# Altium PCB UU111_UUControl_CPUBoard.PcbDoc
Units mm, origin at the board's own origin, x right, y up, seen from the top; angles counter-clockwise.
Board outline 67.6 x 45 mm, 4 copper layers (Top Layer, GND, PWR, Bottom Layer), stack 1.483 mm thick; 65 components, 76 nets, 350 pads, 118 vias.
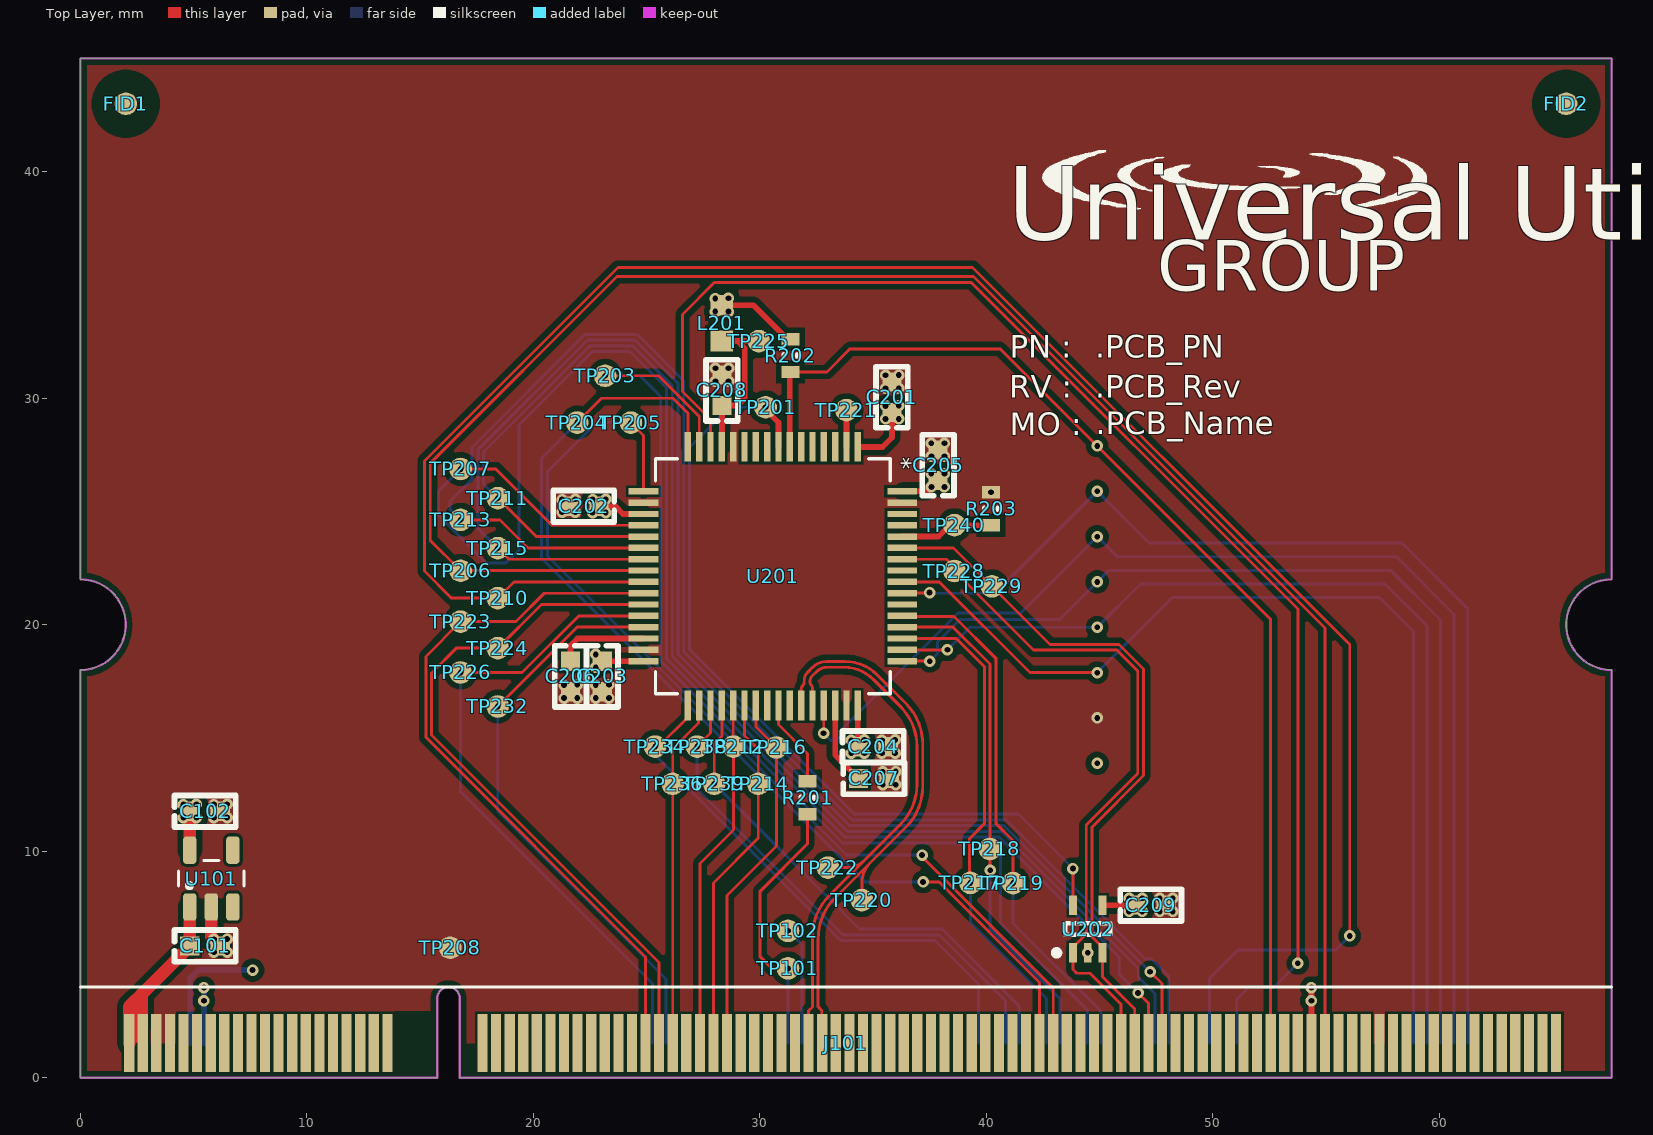
[diagram p0: Top Layer view]
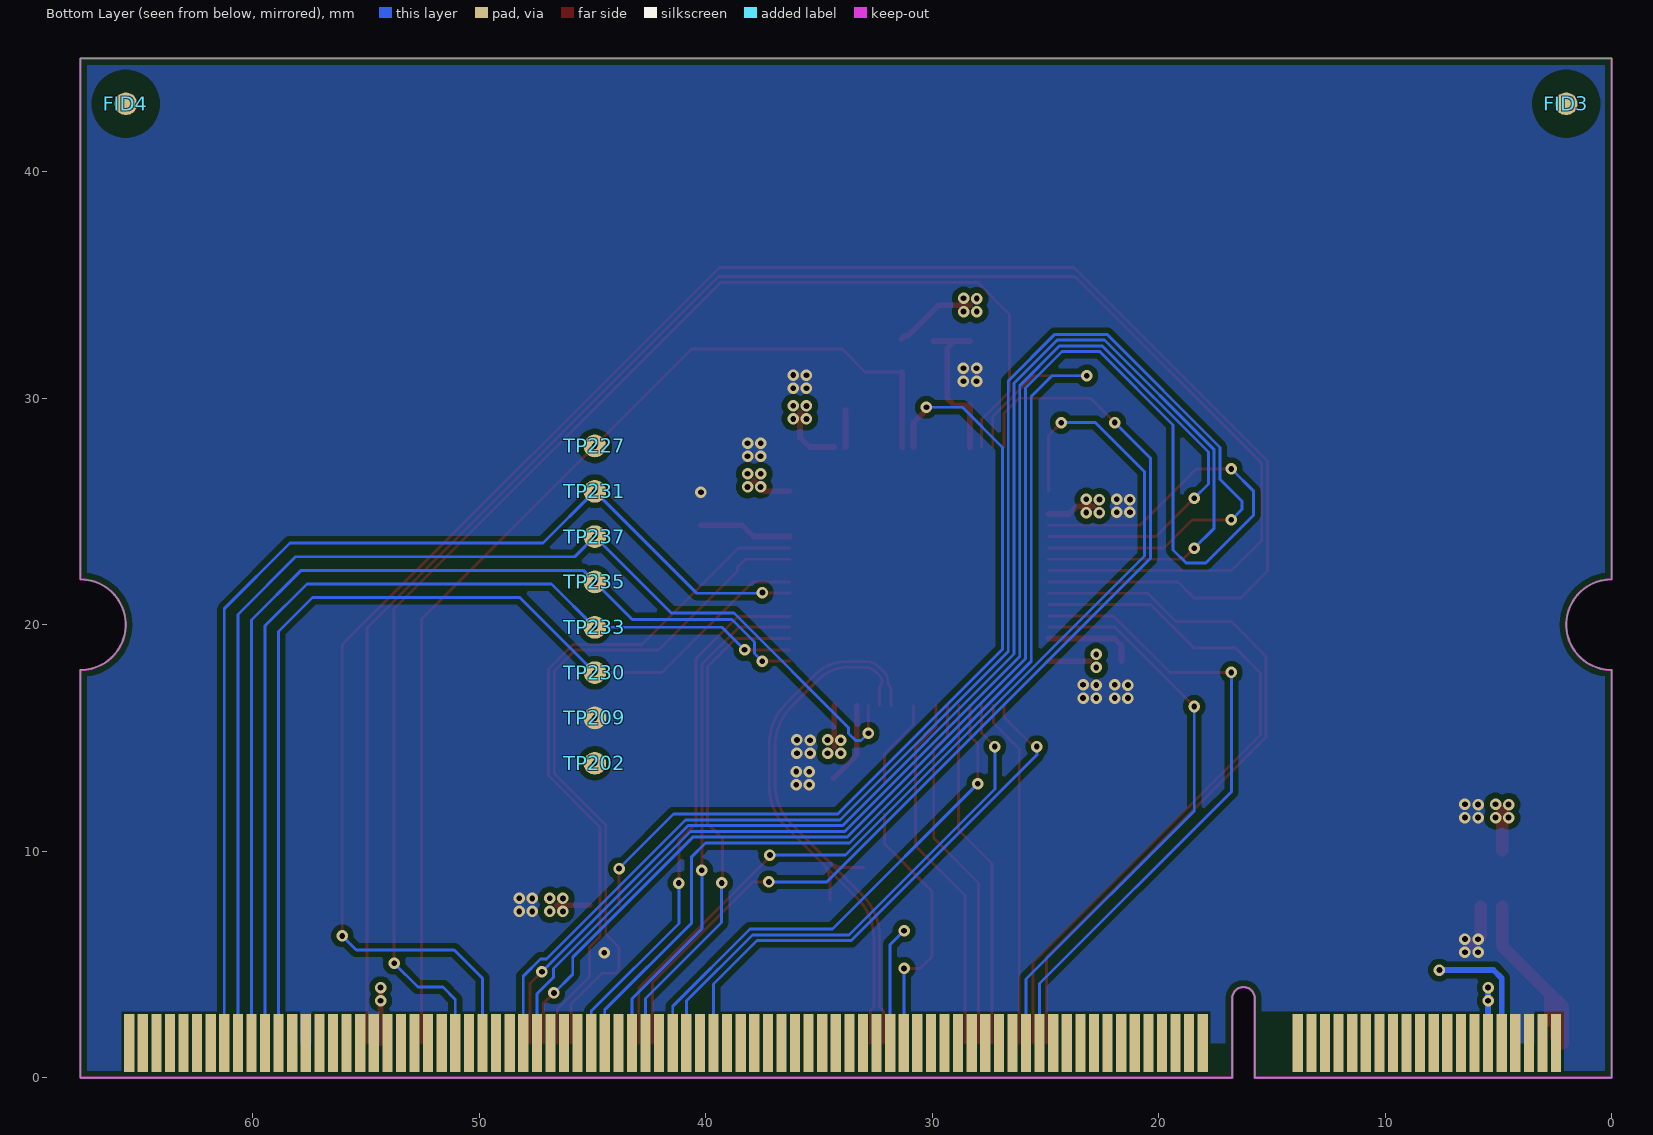
[diagram p1: Bottom Layer view, seen from below]
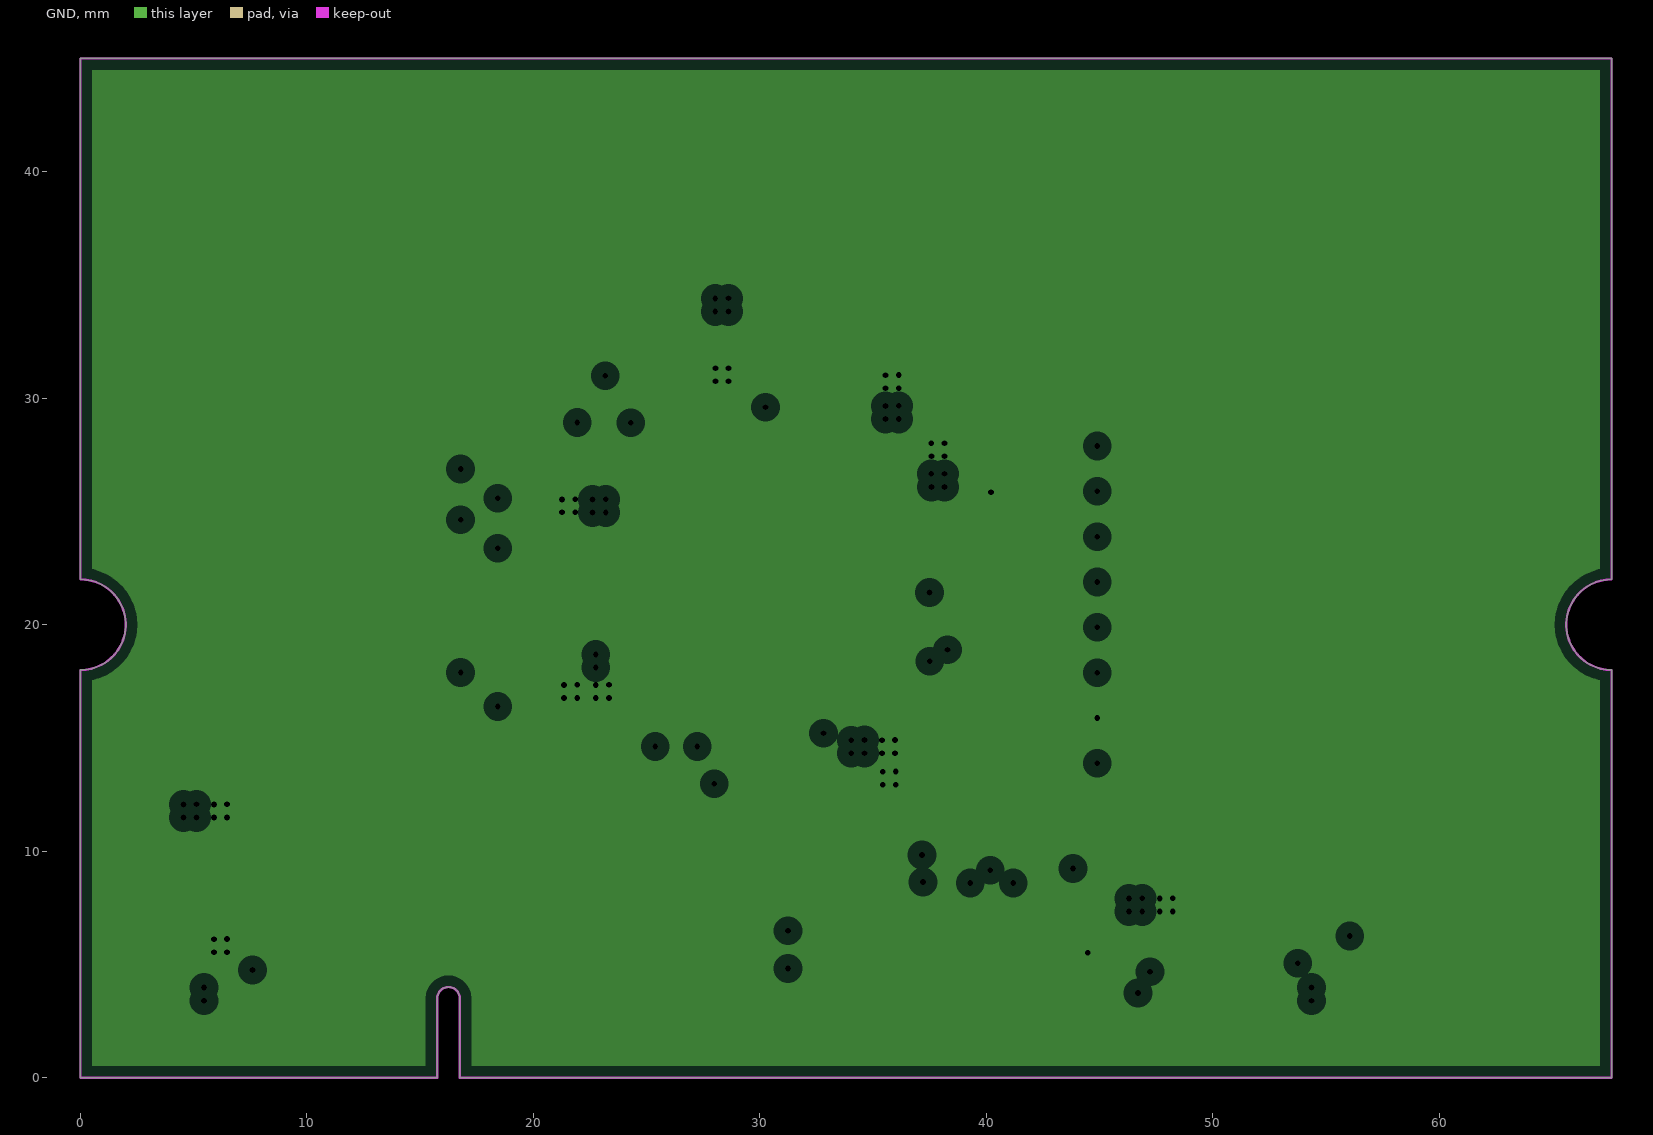
[diagram p2: GND, clearances drawn from the general rule]
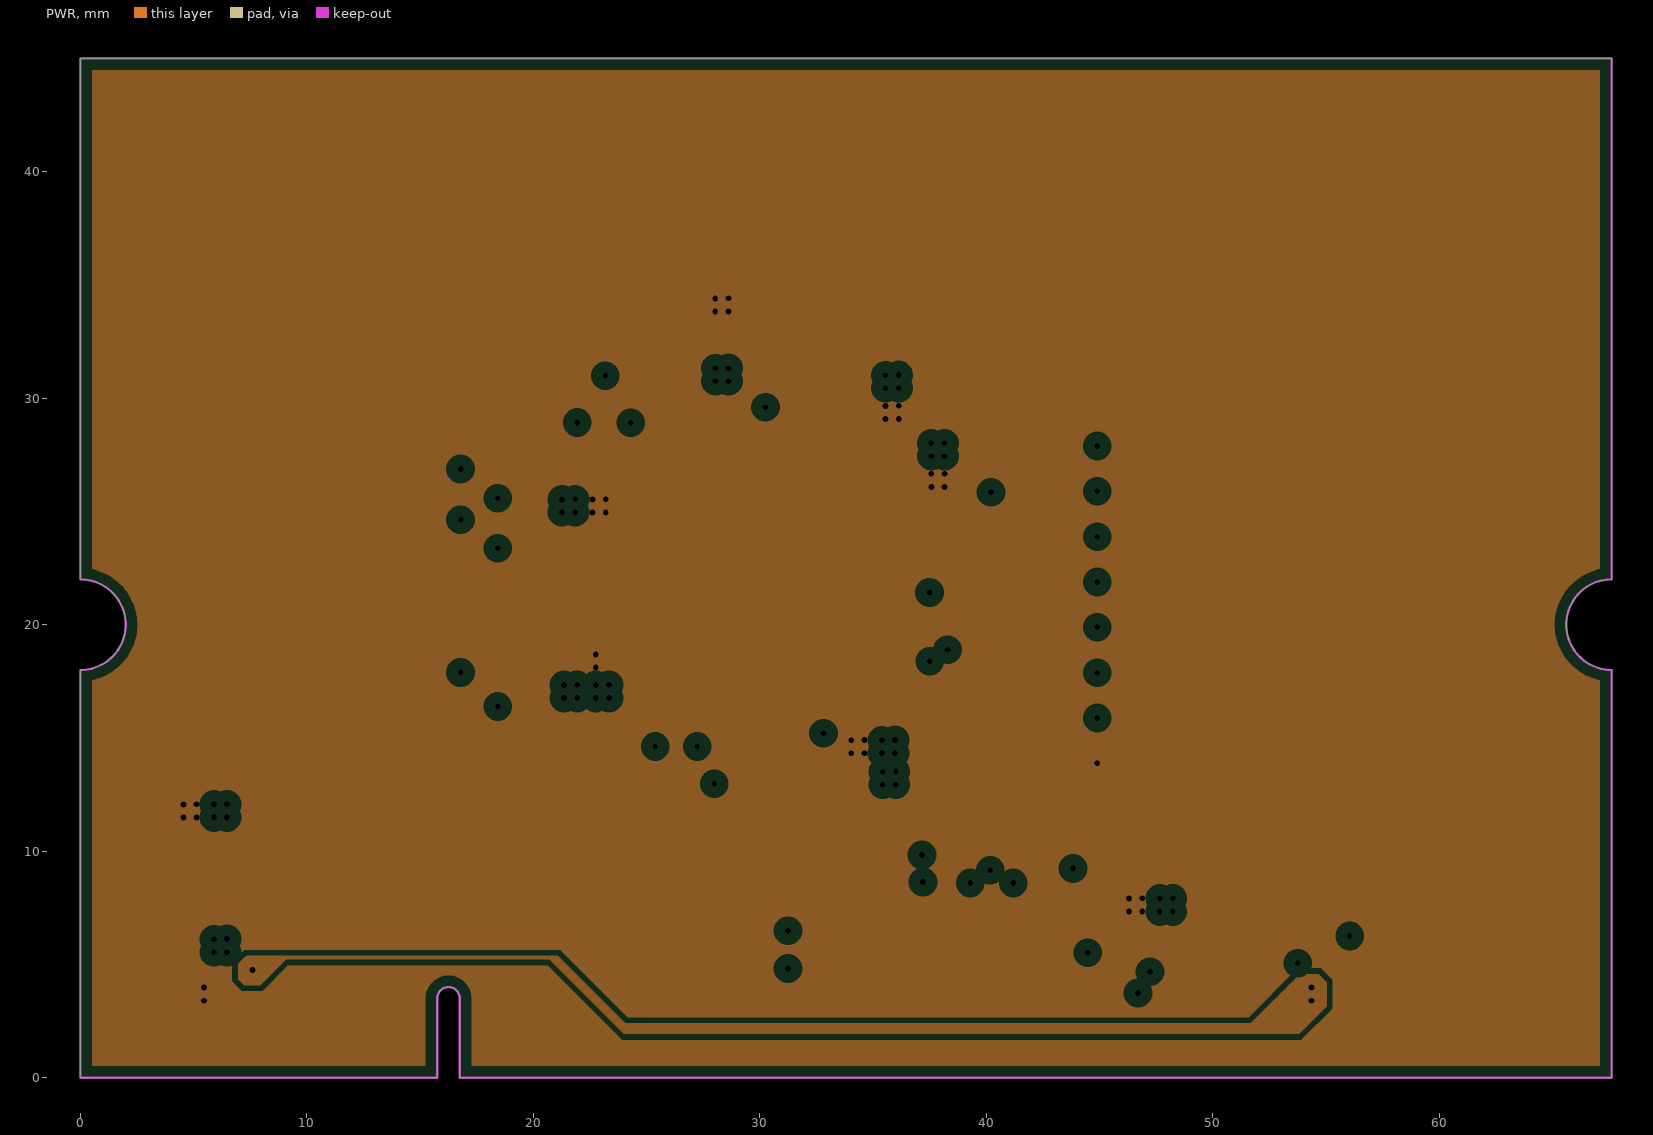
[diagram p3: PWR, clearances drawn from the general rule]
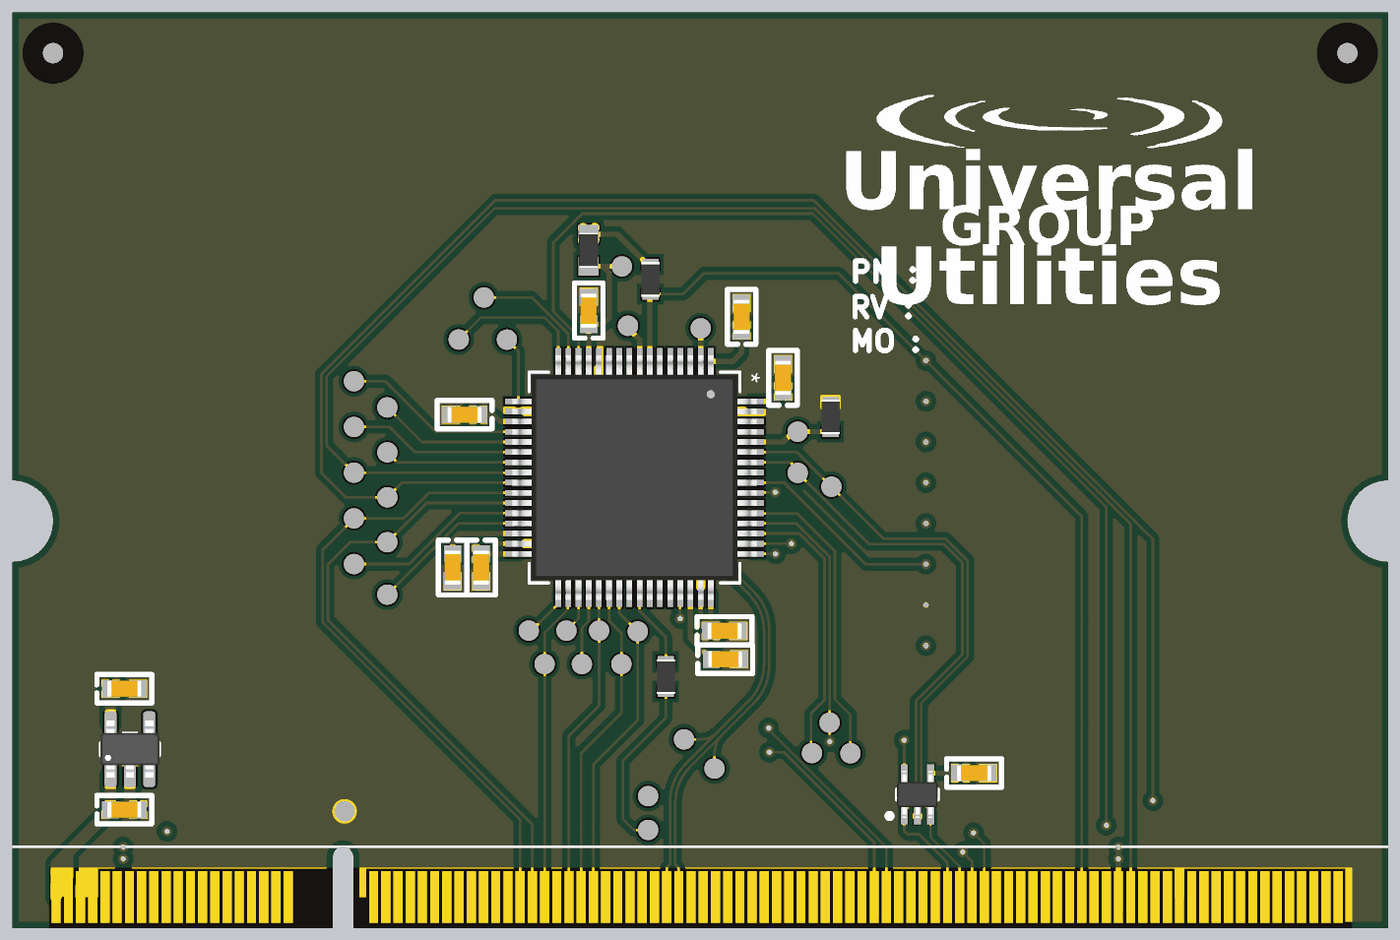
[diagram p4: 3D render of the assembled board from above, using the file's embedded part models]

## Layer stack, top to bottom
Top Solder: solder mask 0.0254, Solder Resist, Dk 3.5
Top Layer: signal copper 0.0356
Dielectric 1: prepreg 0.0711, PP-006, Dk 4.1
GND: plane copper 0.035, net DGND
Core: core 1.2, FR-4, Dk 3.95
PWR: plane copper 0.035, net +3.3VD
Dielectric 2: prepreg 0.0711, PP-006, Dk 4.1
Bottom Layer: signal copper 0.0356
Bottom Solder: solder mask 0.0254, Solder Resist, Dk 3.5

## Board outline
0,0 0,18 ccw(c0,20) 0,22 0,45 67.6,45 67.6,22 ccw(c67.6,20) 67.6,18 67.6,0 16.75,0 16.75,3.5 ccw(c16.25,3.5) 16.25,4 ccw(c16.25,3.5) 15.75,3.5 15.75,0

## Design rules (kind name [scope] priority, off if disabled: settings)
Clearance Clearance_FID [HasPad('FID*')] p1: gap=1 ignorepadtopadclearanceinfootprint=FALSE except(0: Arc-Hole Track-Hole SMDPad-Hole THPad-Hole Via-Hole Fill-Hole Poly-Hole Region-Hole Text-Hole)
Clearance Clearance_USB [HasPad('J40*')] p2: gap=0.127 ignorepadtopadclearanceinfootprint=FALSE
Clearance Clearance_Polygon [InNamedPolygon('MVA') or InNamedPolygon('MVAP')  or InNamedPolygon('3V') or InNamedPolygon('AGNDP')] p3: gap=0.556 ignorepadtopadclearanceinfootprint=FALSE except(0: Arc-Hole Track-Hole SMDPad-Hole THPad-Hole Via-Hole Fill-Hole Poly-Hole Region-Hole Text-Hole)
Clearance Clearance_IC [HasPad('C*') or  HasPad('U*') or HasPad('J*') or HasPad('Q*')] p4: gap=0.127 ignorepadtopadclearanceinfootprint=FALSE except(0: Arc-Hole Track-Hole SMDPad-Hole THPad-Hole Via-Hole Fill-Hole Poly-Hole Region-Hole Text-Hole)
Clearance Clearance_GND [InNet('AGND') or InNet('DGND')  or InNamedPolygon('DGNDP')] p5: gap=0.254 ignorepadtopadclearanceinfootprint=FALSE except(0: Arc-Hole Track-Hole SMDPad-Hole THPad-Hole Via-Hole Fill-Hole Poly-Hole Region-Hole Text-Hole)
Clearance [All] p6: gap=0.127 ignorepadtopadclearanceinfootprint=FALSE except(0: Arc-Hole Track-Hole SMDPad-Hole THPad-Hole Via-Hole Fill-Hole Poly-Hole Region-Hole Text-Hole)
ComponentClearance ComponentClearance_DDR [HasFootprint('DDR2-SO-DIMM')] p1: gap=0 collisioncheckmode=3 verticalgap=0 showdistances=FALSE
ComponentClearance [All] p2: gap=0.254 collisioncheckmode=3 verticalgap=0.254 showdistances=FALSE
DiffPairsRouting DiffPairsRouting_1 [All] p2: maxlimit=0.254 minlimit=0.254 mostfreqgap=0.254 toplayer_minwidth=0.381 toplayer_maxwidth=0.381 toplayer_prefwidth=0.381 bottomlayer_minwidth=0.381 bottomlayer_maxwidth=0.381 bottomlayer_prefwidth=0.381 maxuncoupledlength=12.7
FanoutControl Fanout_LCC [IsLCC] p1: bgadir=Out bgaviamode=Centered fanoutstyle=Auto fanoutdirection=Alternating viagrid=0.025 // Fanout_LCC (Default Rule)
FanoutControl Fanout_SOIC [IsSOIC] p2: bgadir=Out bgaviamode=Centered fanoutstyle=Auto fanoutdirection=Alternating viagrid=0.025 // Fanout_SOIC (Default Rule)
FanoutControl Fanout_BGA [IsBGA] p3: bgadir=Out bgaviamode=Centered fanoutstyle=Auto fanoutdirection=Alternating viagrid=0.025 // Fanout_BGA (Default Rule)
FanoutControl Fanout_Default [All] p4: bgadir=Out bgaviamode=Centered fanoutstyle=Auto fanoutdirection=Alternating viagrid=0.025 // Fanout_Default (Default Rule)
FanoutControl Fanout_Small [(CompPinCount < 5)] p5: bgadir=Out bgaviamode=Centered fanoutstyle=Auto fanoutdirection=OutThenIn viagrid=0.025 // Fanout_Small (Default Rule)
HoleToHoleClearance [All] p1: gap=0.25 allowstackedmicrovias=TRUE
MinimumAnnularRing [All] p1: minimumring=0.05
MinimumSolderMaskSliver [All] p1: minsoldermaskwidth=0.05
PasteMaskExpansion PasteMaskExpansion_1 [All] p2: expansion=0
PlaneClearance [All] p1: clearance=0.508
PlaneConnect [All] p1: planeconnectstyle=Direct reliefexpansion=0.508 reliefentries=4 reliefconductorwidth=0.254 reliefairgap=0.254
PolygonConnect [All] p1: connectstyle=Direct reliefconductorwidth=0.254 reliefentries=4 polygonreliefangle="90 Angle" airgapwidth=0.254
RoutingVias [All] p1: holewidth=0.711 width=1.27 viastyle="Through Hole" minholewidth=0.15 minwidth=0.3 maxholewidth=0.711 maxwidth=1.27
SilkToBoardRegionClearance SilkToBoardRegionClearance_3 [All] p2:
SilkToBoardRegionClearance SilkToBoardRegionClearance_2 [All] p3:
SilkToBoardRegionClearance SilkToBoardRegionClearance_1 [All] p4:
SilkToSolderMaskClearance [IsPad] p1: minsilkscreentomaskgap=0.12 clearancetoexposedcopper=TRUE
SolderMaskExpansion [All] p1: expansion=0.102 istentingtop=FALSE
SolderMaskExpansion SolderMaskExpansion_1 [All] p2: expansion=0.102 istentingtop=FALSE
Width Width_BGA [All] p1: maxlimit=5.56 minlimit=0.127 preferedwidth=0.254
Width [All] p2: maxlimit=5.56 minlimit=0.127 preferedwidth=0.254
19 further rules are at their usual default settings.

## Classes and differential pairs
component class MCU: C201 C202 C203 C204 C205 C206 C207 C208 C209 L201 R201 R202 R203 TP201 TP202 TP203 TP204 TP205 TP206 TP207 TP208 TP209 TP210 TP211 TP212 TP213 TP214 TP215 TP216 TP217 TP218 TP219 TP220 TP221 TP222 TP223 TP224 TP225 TP226 TP227 TP228 TP229 TP230 TP231 TP232 TP233 TP234 TP235 TP236 TP237 TP238 TP239 TP240 U201 U202
component class 0_Overview: FID1 FID2 FID3 FID4 PCB1
component class MainControl: C101 C102 J101 TP101 TP102 U101

## Components (designator, comment, footprint, x,y, rotation, side; value= is the part's Value field where it differs from the comment)
C101 "0.1uF" C_0603 5.502,5.816 r0 top
C102 "0.1uF" C_0603 5.502,11.764 r0 top
C201 "0.1uF" C_0603 35.83,30.04 r90 top
C202 "0.1uF" C_0603 22.22,25.23 r180 top
C203 "0.1uF" C_0603 23.037,17.715 r270 top
C204 "0.1uF" C_0603 34.995,14.607 r0 top
C205 "0.1uF" C_0603 37.866,27.041 r90 top
C206 "0.1uF" C_0603 21.637,17.715 r270 top
C207 "0.1uF" C_0603 35.03,13.21 r0 top
C208 "0.1uF" C_0603 28.32,30.348 r90 top
C209 "0.1uF" C_0603 47.258,7.618 r0 top
FID1 "FIDUCIAL" FID 2,43 r0 top value="Non SE"
FID2 "FIDUCIAL" FID 65.6,43 r90 top value="Non SE"
FID3 "FIDUCIAL" FID 2,43 r90 bottom value="Non SE"
FID4 "FIDUCIAL" FID 65.6,43 r90 bottom value="Non SE"
J101 "1473149-4" DDR2-SO-DIMM 0,0 r0 top locked
L201 "10uH" L_0603 28.314,33.313 r270 top
R201 "0" R_0603 32.105,12.361 r270 top
R202 "150k" R_0603 31.349,31.883 r270 top
R203 "0" R_0603 40.203,25.121 r270 top
TP101 "" TP_Testpoint 31.239,4.824 r180 top
TP102 "" TP_Testpoint 31.239,6.484 r180 top
TP201 "" TP_Testpoint 30.25,29.6 r0 top
TP202 "" TP_Testpoint 44.89,13.88 r180 bottom
TP203 "" TP_Testpoint 23.168,30.99 r270 top
TP204 "" TP_Testpoint 21.933,28.925 r0 top
TP205 "" TP_Testpoint 24.3,28.92 r0 top
TP206 "" TP_Testpoint 16.785,22.382 r180 top
TP207 "" TP_Testpoint 16.785,26.875 r0 top
TP208 "" TP_Testpoint 16.325,5.737 r0 top
TP209 "" TP_Testpoint 44.89,15.882 r0 bottom
TP210 "" TP_Testpoint 18.425,21.171 r180 top
TP211 "" TP_Testpoint 18.425,25.587 r0 top
TP212 "" TP_Testpoint 28.829,14.618 r270 top
TP213 "" TP_Testpoint 16.785,24.628 r0 top
TP214 "" TP_Testpoint 29.926,12.975 r270 top
TP215 "" TP_Testpoint 18.425,23.379 r0 top
TP216 "" TP_Testpoint 30.728,14.578 r90 top
TP217 "" TP_Testpoint 39.29,8.6 r180 top
TP218 "" TP_Testpoint 40.153,10.097 r180 top
TP219 "" TP_Testpoint 41.18,8.59 r270 top
TP220 "" TP_Testpoint 34.5,7.84 r180 top
TP221 "" TP_Testpoint 33.82,29.474 r0 top
TP222 "" TP_Testpoint 33.004,9.272 r180 top
TP223 "" TP_Testpoint 16.785,20.136 r0 top
TP224 "" TP_Testpoint 18.425,18.963 r0 top
TP225 "" TP_Testpoint 29.95,32.52 r0 top
TP226 "" TP_Testpoint 16.785,17.889 r0 top
TP227 "" TP_Testpoint 44.89,27.891 r0 bottom
TP228 "" TP_Testpoint 38.59,22.37 r0 top
TP229 "" TP_Testpoint 40.245,21.692 r0 top
TP230 "" TP_Testpoint 44.89,17.883 r180 bottom
TP231 "" TP_Testpoint 44.89,25.889 r180 bottom
TP232 "" TP_Testpoint 18.425,16.388 r0 top
TP233 "" TP_Testpoint 44.89,19.885 r0 bottom
TP234 "" TP_Testpoint 25.375,14.618 r270 top
TP235 "" TP_Testpoint 44.89,21.886 r180 bottom
TP236 "" TP_Testpoint 26.15,12.975 r270 top
TP237 "" TP_Testpoint 44.89,23.888 r0 bottom
TP238 "" TP_Testpoint 27.227,14.618 r90 top
TP239 "" TP_Testpoint 27.983,12.975 r90 top
TP240 "" TP_Testpoint 38.59,24.396 r0 top
U101 "RT9069-33GB" SOT95P280X145-5N 5.777,8.79 r90 top
U201 "STM32H7A3RGT6" LQFP64 30.57,22.14 r270 top
U202 "24AA02HT-I/LT" SOT65P210X110-5N 44.473,6.562 r90 top

## Footprints (in the part's own frame and the unit in brackets; to place one, negate y for a bottom-side part, rotate by r counter-clockwise, add the part's x,y. Pads: shape width x height; smd on the part's side, far side on the other; paste and mask are expansions set on the pad)
C_0603 [mm] "Chip Capacitor, 2-Leads, Body 1.60x0.75mm, IPC Medium Density"
  rect 0.85x0.85 smd mask+0.03: 1(-0.675,0) 2(0.675,0)
  silkscreen extent -1.35,-0.7 1.35,0.7, body extent -0.85,-0.4 0.85,0.4, height 0.8
DDR2-SO-DIMM [mm]
  rect 0.45x2.55 smd paste-0.9 mask+0.102: 1(2.15,1.525) 3(2.75,1.525) 5(3.35,1.525) 7(3.95,1.525) 9(4.55,1.525) 11(5.15,1.525) 13(5.75,1.525) 15(6.35,1.525) 17(6.95,1.525) 19(7.55,1.525) 21(8.15,1.525) 23(8.75,1.525) 25(9.35,1.525) 27(9.95,1.525) 29(10.55,1.525) 31(11.15,1.525) 33(11.75,1.525) 35(12.35,1.525) 37(12.95,1.525) 39(13.55,1.525) 41(17.75,1.525) 43(18.35,1.525) 45(18.95,1.525) 47(19.55,1.525) 49(20.15,1.525) 51(20.75,1.525) 53(21.35,1.525) 55(21.95,1.525) 57(22.55,1.525) 59(23.15,1.525) 61(23.75,1.525) 63(24.35,1.525) 65(24.95,1.525) 67(25.55,1.525) 69(26.15,1.525) 71(26.75,1.525) 73(27.35,1.525) 75(27.95,1.525) 77(28.55,1.525) 79(29.15,1.525) 81(29.75,1.525) 83(30.35,1.525) 85(30.95,1.525) 87(31.55,1.525) 89(32.15,1.525) 91(32.75,1.525) 93(33.35,1.525) 95(33.95,1.525) 97(34.55,1.525) 99(35.15,1.525) 101(35.75,1.525) 103(36.35,1.525) 105(36.95,1.525) 107(37.55,1.525) 109(38.15,1.525) 111(38.75,1.525) 113(39.35,1.525) 115(39.95,1.525) 117(40.55,1.525) 119(41.15,1.525) 121(41.75,1.525) 123(42.35,1.525) 125(42.95,1.525) 127(43.55,1.525) 129(44.15,1.525) 131(44.75,1.525) 133(45.35,1.525) 135(45.95,1.525) 137(46.55,1.525) 139(47.15,1.525) 141(47.75,1.525) 143(48.35,1.525) 145(48.95,1.525) 147(49.55,1.525) 149(50.15,1.525) 151(50.75,1.525) 153(51.35,1.525) 155(51.95,1.525) 157(52.55,1.525) 159(53.15,1.525) 161(53.75,1.525) 163(54.35,1.525) 165(54.95,1.525) 167(55.55,1.525) 169(56.15,1.525) 171(56.75,1.525) 173(57.35,1.525) 175(57.95,1.525) 177(58.55,1.525) 179(59.15,1.525) 181(59.75,1.525) 183(60.35,1.525) 185(60.95,1.525) 187(61.55,1.525) 189(62.15,1.525) 191(62.75,1.525) 193(63.35,1.525) 195(63.95,1.525) 197(64.55,1.525) 199(65.15,1.525)
  rect 0.45x2.55 smd far side paste-0.9 mask+0.102: 2(2.45,1.525) 4(3.05,1.525) 6(3.65,1.525) 8(4.25,1.525) 10(4.85,1.525) 12(5.45,1.525) 14(6.05,1.525) 16(6.65,1.525) 18(7.25,1.525) 20(7.85,1.525) 22(8.45,1.525) 24(9.05,1.525) 26(9.65,1.525) 28(10.25,1.525) 30(10.85,1.525) 32(11.45,1.525) 34(12.05,1.525) 36(12.65,1.525) 38(13.25,1.525) 40(13.85,1.525) 42(18.05,1.525) 44(18.65,1.525) 46(19.25,1.525) 48(19.85,1.525) 50(20.45,1.525) 52(21.05,1.525) 54(21.65,1.525) 56(22.25,1.525) 58(22.85,1.525) 60(23.45,1.525) 62(24.05,1.525) 64(24.65,1.525) 66(25.25,1.525) 68(25.85,1.525) 70(26.45,1.525) 72(27.05,1.525) 74(27.65,1.525) 76(28.25,1.525) 78(28.85,1.525) 80(29.45,1.525) 82(30.05,1.525) 84(30.65,1.525) 86(31.25,1.525) 88(31.85,1.525) 90(32.45,1.525) 92(33.05,1.525) 94(33.65,1.525) 96(34.25,1.525) 98(34.85,1.525) 100(35.45,1.525) 102(36.05,1.525) 104(36.65,1.525) 106(37.25,1.525) 108(37.85,1.525) 110(38.45,1.525) 112(39.05,1.525) 114(39.65,1.525) 116(40.25,1.525) 118(40.85,1.525) 120(41.45,1.525) 122(42.05,1.525) 124(42.65,1.525) 126(43.25,1.525) 128(43.85,1.525) 130(44.45,1.525) 132(45.05,1.525) 134(45.65,1.525) 136(46.25,1.525) 138(46.85,1.525) 140(47.45,1.525) 142(48.05,1.525) 144(48.65,1.525) 146(49.25,1.525) 148(49.85,1.525) 150(50.45,1.525) 152(51.05,1.525) 154(51.65,1.525) 156(52.25,1.525) 158(52.85,1.525) 160(53.45,1.525) 162(54.05,1.525) 164(54.65,1.525) 166(55.25,1.525) 168(55.85,1.525) 170(56.45,1.525) 172(57.05,1.525) 174(57.65,1.525) 176(58.25,1.525) 178(58.85,1.525) 180(59.45,1.525) 182(60.05,1.525) 184(60.65,1.525) 186(61.25,1.525) 188(61.85,1.525) 190(62.45,1.525) 192(63.05,1.525) 194(63.65,1.525) 196(64.25,1.525) 198(64.85,1.525) 200(65.45,1.525)
  silkscreen extent 0,4 67.6,4
FID [mm]
  round 1 smd mask+1: ""(0,0)
L_0603 [mm] "Chip Inductor, 2-Leads, Body 1.60x0.80mm, IPC Medium Density"
  rect 0.92x0.98 smd: 1(-0.79,0) 2(0.79,0)
  body extent -0.87,-0.48 0.87,0.48, height 0.8
LQFP64 [mil]
  rect 51.5x11 smd: 1(-224.75,147.64) 2(-224.75,127.95) 3(-224.75,108.27) 4(-224.75,88.58) 5(-224.75,68.9) 6(-224.75,49.21) 7(-224.75,29.53) 8(-224.75,9.84) 9(-224.75,-9.84) 10(-224.75,-29.53) 11(-224.75,-49.21) 12(-224.75,-68.9) 13(-224.75,-88.58) 14(-224.75,-108.27) 15(-224.75,-127.95) 16(-224.75,-147.64) 33(224.75,-147.64) 34(224.75,-127.95) 35(224.75,-108.27) 36(224.75,-88.58) 37(224.75,-68.9) 38(224.75,-49.21) 39(224.75,-29.53) 40(224.75,-9.84) 41(224.75,9.84) 42(224.75,29.53) 43(224.75,49.21) 44(224.75,68.9) 45(224.75,88.58) 46(224.75,108.27) 47(224.75,127.95) 48(224.75,147.64)
  rect 11x51.5 smd: 17(-147.64,-224.75) 18(-127.95,-224.75) 19(-108.27,-224.75) 20(-88.58,-224.75) 21(-68.9,-224.75) 22(-49.21,-224.75) 23(-29.53,-224.75) 24(-9.84,-224.75) 25(9.84,-224.75) 26(29.53,-224.75) 27(49.21,-224.75) 28(68.9,-224.75) 29(88.58,-224.75) 30(108.27,-224.75) 31(127.95,-224.75) 32(147.64,-224.75) 49(147.64,224.75) 50(127.95,224.75) 51(108.27,224.75) 52(88.58,224.75) 53(68.9,224.75) 54(49.21,224.75) 55(29.53,224.75) 56(9.84,224.75) 57(-9.84,224.75) 58(-29.53,224.75) 59(-49.21,224.75) 60(-68.9,224.75) 61(-88.58,224.75) 62(-108.27,224.75) 63(-127.95,224.75) 64(-147.64,224.75)
  silkscreen extent -204,-204 204,204, body extent -236,-236 236,236, height 63
R_0603 [mm] "Chip Resistor, 2-Leads, Body 1.60x0.80mm, IPC High Density"
  rect 0.55x0.8 smd: 1(-0.725,0) 2(0.725,0)
  silkscreen extent -0.05,-0.3 0.05,0.3, body extent -0.85,-0.45 0.85,0.45, height 0.45
SOT65P210X110-5N [mm] "SOT23, 5-Leads, Body 2.00x2.10mm, Pitch 0.65mm, IPC Medium Density"
  rect 0.85x0.35 smd mask+0.05: 1(-1.05,0.65) 2(-1.05,0) 3(-1.05,-0.65) 4(1.05,-0.65) 5(1.05,0.65)
  silkscreen extent -1.17,-1 0.25,1.5, body extent -1.15,-1 1.15,1, height 1.1
SOT95P280X145-5N [mm]
  rrect50% 1.21x0.59 smd: 1(-1.255,0.95) 2(-1.255,0) 3(-1.255,-0.95) 4(1.255,-0.95) 5(1.255,0.95)
  silkscreen extent -0.41,-1.45 0.8,1.45, body extent -1.4,-1.45 1.4,1.45, height 1.45
TP_Testpoint [mm] "Size 1 mm"
  round 1 smd: 1(0,0)

## Part data
C101 C102 C201 C202 C203 C204 C205 C206 C207 C208 C209: library part C_Capacitor, "CAP CER 0.1UF 50V X7R 0603", Manufacturer=KEMET, PartNumber=C0603C104K5RACTU, Value2=50V, PackageReference=0603, PartID=399-5089-1-ND
FID1 FID2 FID3 FID4: library part FID_FIDUCIAL, "Fiducial", Manufacturer=mindek30@gmail.com, PartNumber=UU111_A, Value2="Non SE", PackageReference="Non SE", PartID=A, Value3="Non SE"
J101: library part CON_DDR2, "CONN SKT SODIMM 200POS R/A SMD", Manufacturer="TE Connectivity AMP Connectors", PartID=A114854-ND, PartNumber=1473149-4
L201: library part L_Inductor, "10µH Shielded Multilayer Inductor 250mA 1.05Ohm 0603 (1608 Metric)", Manufacturer="TDK Corporation", PartNumber=MLZ1608M100WT000, PackageReference=0603, PartID=445-6389-1-ND
R201 R203: library part R_Resister, "RES SMD 0 OHM JUMP 1/10W 0603", Manufacturer="Vishay Dale", PartNumber=CRCW06030000Z0EBC, Value2=0.1W, PackageReference=0603, PartID=541-4013-1-ND
R202: library part R_Resister, "RES SMD 150K OHM 1% 1/10W 0603", Manufacturer="Vishay Dale", PartNumber=CRCW0603150KFKEAC, Value2=0.1W, PackageReference=0603, PartID=541-4034-1-ND
TP101 TP102 TP201 TP202 TP203 TP204 TP205 TP206 TP207 TP208 TP209 TP210 TP211 TP212 TP213 TP214 TP215 TP216 TP217 TP218 TP219 TP220 TP221 TP222 TP223 TP224 TP225 TP226 TP227 TP228 TP229 TP230 TP231 TP232 TP233 TP234 TP235 TP236 TP237 TP238 TP239 TP240: library part TP_TestPoint, "TestPoint"
U101: library part IC_LDO_RT9069-33GB, "200mA 360mV@(10mA) Fixed 3.3V~3.3V Positive 1 36V SOT-23-5 Linear Voltage Regulators (LDO) ROHS", Manufacturer="Richtek Tech", PackageReference=SOT-23-5, PartID=C147969, PartNumber=RT9069-33GB
U201: library part IC_MCU_STM32H7A3RGT6, "IC MCU 32BIT 1376KB FLSH 64LQFP", Manufacturer=STMicroelectronics, PackageReference=LQFP-64, PartID=511-STM32H7A3RGT6, PartNumber=STM32H7A3RGT6
U202: library part IC_MEM_24AA02HT, "IC EEPROM 2KBIT I2C SC70-5", Manufacturer="Microchip Technology", PackageReference=SC-70-5, PartID=24AA02HT-I/LTCT-ND, PartNumber=24AA02HT-I/LT

## Via types
v1: diameter 0.508, hole 0.254, Top Layer to Bottom Layer, tented both sides, 118 vias

## Nets (pads, with @x,y where several pads share a name; then routed paths per layer and width w, separated by ;. In a path a pad name is that pad's centre, name@x,y a point inside that pad or via, vN(x,y) a via of type N, cw(c..) or ccw(c..) an arc to the next point about the centre after c; other vN are vias at no path point)
+1.8VD: J101.10 J101.163 | length 8.2
  Top Layer w0.254: J101.163 v1(54.35,3.397) v1(54.35,3.98)
  Bottom Layer w0.254: J101.10 4.85,4.39 5.21,4.75 v1(7.6,4.75)
+3.3VD: C102.1 C201.1 C202.1 C203.1 C204.1 C205.1 C209.1 J101.12 L201.1 R202.1 TP202.1 U101.5 U201.1 U201.19 U201.32 U201.48 U201.64 U202.4 | length 19.6
  Top Layer w0.254: C202.1 23.61,25.23 23.95,24.89 U201.19 ; C203.1 U201.32 ; L201.1 29.72,34.103 31.067,32.756 31.201,32.756 R202.1 ; C204.1 U201.48 ; U201.1 35.409,27.849 35.83,28.27 C201.1 ; U201.64 37.39,25.89 C205.1 ; U202.4 C209.1@46.576,7.612
  Top Layer w0.556: U101.5 C102.1
  Bottom Layer w0.254: J101.12 v1(5.45,3.98)
  other v1: 5.45,3.397 46.3,7.34 46.878,7.34 46.3,7.913 46.878,7.923 4.544,11.485 5.122,11.485 4.544,12.059 5.122,12.069 44.89,13.88 34.037,14.329 34.615,14.329 34.037,14.902 34.615,14.912 22.754,18.112 22.754,18.685 22.612,24.952 23.19,24.952 22.612,25.525 23.19,25.535 37.571,26.083 38.144,26.083 37.561,26.661 38.144,26.661 35.547,29.087 36.125,29.087 35.547,29.66 36.125,29.67 28.031,33.824 28.61,33.824 28.031,34.398 28.61,34.408
+MVD: C101.1 J101.1 J101.2 J101.3 J101.4 U101.1 U101.4 | length 9.9
  Top Layer w0.556: J101.1 2.15,3.139 2.713,3.703 ; 2.432,1.807 2.432,3.421 ; J101.3@2.713,2.522 2.713,3.703 ; U101.1 C101.1 2.713,3.703
+VUSB_IN: J101.86 R201.2 TP101.1 | length 11.9
  Top Layer w0.127: v1(31.239,4.824) 30.526,4.824 30.01,5.34 30.01,8.23 32.105,10.325 R201.2
  Bottom Layer w0.127: v1(31.239,4.824) 31.239,1.536 J101.86
CAN1_RX: J101.131
CAN1_TX: J101.129
DGND: C101.2 C102.2 C201.2 C202.2 C203.2 C204.2 C205.2 C206.2 C207.2 C208.2 C209.2 J101.5 J101.6 J101.7 J101.8 J101.164 J101.173 J101.174 R203.1 TP208.1 TP209.1 U101.2 U201.12 U201.18 U201.31 U201.47 U201.63 U202.2 | length 1.9
  Top Layer w0.556: U101.2 5.777,6.216 6.172,5.821 C101.2
  other v1: 44.473,5.512 5.894,5.538 6.472,5.538 5.894,6.111 6.472,6.121 47.65,7.34 48.228,7.34 47.65,7.913 48.228,7.923 5.894,11.485 6.472,11.485 5.894,12.059 6.472,12.069 35.422,12.932 36,12.932 35.422,13.505 36,13.515 35.387,14.329 35.965,14.329 35.387,14.902 35.965,14.912 44.89,15.882 21.354,16.762 21.932,16.762 22.754,16.762 23.332,16.762 21.354,17.335 21.932,17.345 22.754,17.335 23.332,17.345 21.262,24.961 21.84,24.961 21.262,25.525 21.84,25.535 40.203,25.846 37.571,27.433 38.144,27.433 37.561,28.011 38.144,28.011 35.547,30.437 36.125,30.437 28.037,30.744 28.615,30.744 35.547,31.01 36.125,31.02 28.037,31.318 28.615,31.328
I2C0_SCA: J101.137 TP229.1 U201.59 U202.3 | length 31.1
  Top Layer w0.127: U201.59 38.547,23.39 TP229.1 42.807,19.13 45.86,19.13 46.94,18.05 46.94,13.335 44.66,11.055 44.66,6.225 45.123,5.762 45.123,4.457 46.55,3.03 J101.137
I2C0_SCL: J101.135 TP228.1 U201.58 U202.1 | length 31.4
  Top Layer w0.127: U201.58 38.238,22.89 38.59,22.538 TP228.1 42.084,18.876 45.755,18.876 46.68,17.95 46.68,13.434 44.406,11.16 44.406,6.344 43.823,5.762 U202.1 43.823,4.777 43.99,4.61 44.57,4.61 45.95,3.23 J101.135
I2C1_WP: TP201.1 U201.8 U202.5 | length 37.6
  Top Layer w0.127: v1@43.82,9.233 43.823,9.23 U202.5
  Top Layer w0.254: v1(30.25,29.6) 30.25,29.494 30.82,28.924 U201.8
  Bottom Layer w0.127: v1(30.25,29.6) 28.66,29.6 26.89,27.83 26.89,18.914 34.164,11.64 41.41,11.64 v1(43.82,9.23)
LED_100n: J101.199
LED_1000n: J101.198
LED_ACT: J101.197
LED_ERROR: J101.50
LED_MAN: J101.49
LED_RUN: J101.51
LED_STOP: J101.52
LED_Task: J101.152 U201.14 | length 61
  Top Layer w0.127: U201.14 27.82,29.053 27.574,29.299 27.574,29.301 26.58,30.295 26.58,33.696 28,35.116 39.326,35.116 53.75,20.692 v1(53.75,5.05)
  Bottom Layer w0.127: J101.152 51.05,3.45 51.6,4 52.7,4 v1(53.75,5.05)
MCU_BOOT: R203.2 TP240.1 U201.60 | length 4.1
  Top Layer w0.254: U201.60 37.882,23.89 38.388,24.396 TP240.1 R203.2
MCU_OSC32_IN: U201.3
MCU_OSC32_OUT: U201.4
MCU_OSC_IN: U201.5
MCU_OSC_OUT: U201.6
MCU_RESET: J101.157 R202.2 TP227.1 U201.7 | length 48.6
  Top Layer w0.127: R202.2 32.958,31.158 33.98,32.18 40.601,32.18 v1(44.89,27.891) 52.55,20.231 J101.157
  Top Layer w0.254: U201.7 31.32,31.128 R202.2
NetC206_1: C206.1 U201.30 | length 4
  Top Layer w0.254: C206.1 21.637,19.077 21.95,19.39 U201.30
NetC207_1: C207.1 U201.46 | length 3.7
  Top Layer w0.254: U201.46 33.32,14.245 C207.1
NetC208_1: C208.1 L201.2 TP225.1 U201.13 | length 7.3
  Top Layer w0.254: L201.2 29.007,32.523 ; U201.13 C208.1 29.013,29.673 29.33,29.99 29.325,29.995 29.325,32.205 29.007,32.523 ; TP225.1 29.947,32.523 29.007,32.523
NetJ101_65: J101.65 TP223.1 U201.26 | length 31.9
  Top Layer w0.127: U201.26 20.48,21.39 19.226,20.136 TP223.1 15.25,18.601 15.25,15.03 24.95,5.33 J101.65
NetJ101_66: J101.66 TP226.1 U201.28 | length 29
  Top Layer w0.127: v1(16.785,17.889) 19.499,17.889 22,20.39 U201.28
  Bottom Layer w0.127: v1(16.785,17.889) 16.785,12.625 25.25,4.16 J101.66
NetJ101_67: J101.67 TP224.1 U201.27 | length 31.1
  Top Layer w0.127: U201.27 20.352,20.89 TP224.1 16.593,18.963 15.504,17.874 15.504,15.135 25.55,5.089 J101.67
NetJ101_68: J101.68 TP232.1 U201.29 | length 25.8
  Top Layer w0.127: v1(18.425,16.388) 21.927,19.89 U201.29
  Bottom Layer w0.127: v1(18.425,16.388) 18.425,11.775 25.85,4.35 J101.68
NetJ101_69: J101.69 TP236.1 U201.34 | length 15.4
  Top Layer w0.127: J101.69 TP236.1 26.15,14.518 27.293,15.661 27.293,16.405 U201.34
NetJ101_73: J101.73 TP212.1 U201.37 | length 15.5
  Top Layer w0.127: J101.73 27.35,9.46 28.829,10.939 TP212.1 28.824,14.623 28.824,16.427 U201.37
NetJ101_75: J101.75 TP214.1 U201.38 | length 16
  Top Layer w0.127: J101.75 27.95,8.6 29.926,10.576 TP214.1 29.926,14.497 29.32,15.104 U201.38
NetJ101_77: J101.77 TP216.1 U201.39 | length 16.2
  Top Layer w0.127: J101.77 28.55,8.05 30.728,10.228 TP216.1 29.82,15.486 U201.39
NetJ101_88: J101.88 TP102.1 | length 5.2
  Bottom Layer w0.127: v1(31.239,6.484) 31.85,5.873 J101.88
NetJ101_130: J101.130 TP203.1 U201.15 | length 49.1
  Top Layer w0.127: v1(23.168,30.99) 25.526,30.99 27.32,29.196 U201.15
  Bottom Layer w0.127: v1(23.168,30.99) 24.7,30.99 25.62,30.07 25.62,18.388 33.644,10.364 40.006,10.364 40.615,9.755 40.615,6.836 44.45,3 J101.130
NetJ101_132: J101.132 TP219.1 U201.53 | length 23.8
  Top Layer w0.127: U201.53 36.301,20.367 38.567,20.367 40.416,18.519 40.416,11.234 41.18,10.47 v1(41.18,8.59)
  Bottom Layer w0.127: v1(41.18,8.59) 41.18,6.81 45.05,2.94 J101.132
NetJ101_139: J101.139 TP207.1 U201.20 | length 72
  Top Layer w0.127: v1(16.785,26.875) 18.335,26.875 20.82,24.39 U201.20 ; v1(46.695,3.74) 47.15,3.286 J101.139
  Bottom Layer w0.127: v1(16.785,26.875) 15.8,25.89 15.8,24.84 17.92,22.72 18.78,22.72 19.36,23.3 19.36,28.822 22.596,32.058 24.264,32.058 25.874,30.448 25.874,18.494 33.75,10.618 40.565,10.618 45.866,5.316 45.866,4.569 v1(46.695,3.74)
NetJ101_148: J101.148 TP210.1 U201.25 | length 89.3
  Top Layer w0.127: U201.25 19.144,21.89 TP210.1 16.389,21.171 15.19,22.37 15.19,27.23 23.73,35.77 39.39,35.77 56.04,19.12 v1(56.04,6.26)
  Bottom Layer w0.127: J101.148 49.85,4.39 51.1,5.64 55.42,5.64 v1(56.04,6.26)
NetJ101_165: J101.165 TP206.1 U201.24 | length 81
  Top Layer w0.127: TP206.1@16.781,22.386 15.444,23.723 15.444,27.125 23.689,35.37 39.431,35.37 54.95,19.851 J101.165 ; TP206.1@16.789,22.386 24.857,22.386 U201.24
NetR201_1: R201.1 U201.41 | length 3.9
  Top Layer w0.127: U201.41 30.82,15.59 32.105,14.305 R201.1
RGMII1_TRN0: J101.179
RGMII1_TRN1: J101.183
RGMII1_TRN2: J101.189
RGMII1_TRN3: J101.193
RGMII1_TRP0: J101.177
RGMII1_TRP1: J101.181
RGMII1_TRP2: J101.187
RGMII1_TRP3: J101.191
SPI0_CSDAC: J101.116
SPI0_MISO: J101.142 TP213.1 U201.22 | length 66.9
  Top Layer w0.127: v1(16.785,24.628) 18.522,24.628 19.76,23.39 U201.22
  Bottom Layer w0.127: v1(16.785,24.628) 16.32,25.093 16.32,25.45 17.29,26.42 17.29,27.83 22.28,32.82 24.58,32.82 26.636,30.764 26.636,18.809 34.065,11.38 40.881,11.38 47.025,5.235 47.295,5.235 48.05,4.48 J101.142
SPI0_MOSI: J101.141 TP215.1 U201.23 | length 65
  Top Layer w0.127: v1(18.425,23.379) 18.914,22.89 U201.23 ; v1(47.226,4.676) 47.75,4.151 J101.141
  Bottom Layer w0.127: v1(18.425,23.379) 17.544,24.26 17.544,27.725 22.385,32.566 24.475,32.566 26.382,30.659 26.382,18.704 33.96,11.126 40.775,11.126 v1(47.226,4.676)
SPI0_SCK: J101.140 TP211.1 U201.21 | length 62.3
  Top Layer w0.127: v1(18.425,25.587) 20.122,23.89 U201.21
  Bottom Layer w0.127: v1(18.425,25.587) 17.798,26.214 17.798,27.62 22.49,32.312 24.37,32.312 26.128,30.554 26.128,18.599 33.855,10.872 40.67,10.872 46.721,4.821 46.721,4.431 47.45,3.702 J101.140
SYS_EMU0: J101.188
SYS_EMU1: J101.190
SYS_JTCK-SWCLK: J101.182 TP235.1 U201.49 | length 45.3
  Top Layer w0.127: U201.49 v1(37.499,18.39)
  Bottom Layer w0.127: v1(37.499,18.39) 37.836,18.727 37.836,19.236 38.83,20.23 43.234,20.23 v1(44.89,21.886) 45.404,22.4 57.853,22.4 60.05,20.203 J101.182
SYS_JTDI: J101.180 TP233.1 U201.50 | length 43.6
  Top Layer w0.127: U201.50 v1(38.28,18.89)
  Bottom Layer w0.127: v1(38.28,18.89) 39.275,19.885 v1(44.89,19.885) 46.805,21.8 57.604,21.8 59.45,19.955 J101.180
SYS_JTDO-SWO: J101.186 TP231.1 U201.55 | length 48.2
  Top Layer w0.127: U201.55 36.294,21.405 37.475,21.405 v1(37.49,21.42)
  Bottom Layer w0.127: v1(37.49,21.42) 37.52,21.39 40.391,21.39 v1(44.89,25.889) 47.179,23.6 58.35,23.6 61.25,20.7 J101.186
SYS_JTMS-SWDIO: J101.184 TP237.1 U201.45 | length 53.4
  Top Layer w0.127: v1(32.812,15.211) 32.816,15.215 32.816,16.427 U201.45
  Bottom Layer w0.127: v1(32.812,15.211) 33.143,14.88 33.37,14.88 33.69,15.2 33.69,15.449 38.751,20.51 41.512,20.51 v1(44.89,23.888) 45.778,23 58.101,23 60.65,20.452 J101.184
SYS_NJTRST: J101.178 TP230.1 U201.56 | length 44.4
  Top Layer w0.127: U201.56 37.92,21.89 41.927,17.883 v1(44.89,17.883)
  Bottom Layer w0.127: v1(44.89,17.883) 48.207,21.2 57.356,21.2 58.85,19.706 J101.178
UART0_RX: J101.119
UART0_TX: J101.117
UART1_LTE_EN: J101.114 TP234.1 U201.33 | length 23.9
  Top Layer w0.127: v1(25.375,14.618) 25.521,14.618 26.82,15.917 U201.33
  Bottom Layer w0.127: v1(25.375,14.618) 25.375,14.245 33.568,6.052 37.728,6.052 39.65,4.13 J101.114
UART1_LTE_PWK: J101.154
UART1_LTE_Reset: TP221.1 U201.2 | length 1.6
  Top Layer w0.254: U201.2 TP221.1
UART1_LTE_RX: J101.120 TP239.1 U201.36 | length 22.8
  Top Layer w0.127: v1(27.983,12.975) 27.983,14.749 28.32,15.086 U201.36
  Bottom Layer w0.127: v1(27.983,12.975) 34.398,6.56 38.04,6.56 41.45,3.15 J101.120
UART1_LTE_TX: J101.118 TP238.1 U201.35 | length 23.3
  Top Layer w0.127: v1(27.227,14.618) 27.82,15.211 U201.35
  Bottom Layer w0.127: v1(27.227,14.618) 27.227,12.752 33.673,6.306 37.935,6.306 40.85,3.391 J101.118
UART2_RX: J101.125 TP205.1 U201.17 | length 44.3
  Top Layer w0.127: v1(24.3,28.92) 24.861,28.359 U201.17 ; v1(37.16,9.83) 37.16,9.753 42.95,3.964 J101.125
  Bottom Layer w0.127: v1(24.3,28.92) 22.784,28.92 20.614,26.75 20.614,23.035 33.819,9.83 v1(37.16,9.83)
UART2_TX: J101.123 TP204.1 U201.16 | length 46.2
  Top Layer w0.127: v1(21.933,28.925) 23.008,30 26.157,30 26.82,29.337 U201.16 ; v1(37.2,8.64) 37.914,8.64 42.35,4.204 J101.123
  Bottom Layer w0.127: v1(21.933,28.925) 20.36,27.352 20.36,22.93 34.65,8.64 v1(37.2,8.64)
UART3_RX: J101.126 TP218.1 U201.52 | length 22.6
  Top Layer w0.127: U201.52 38.529,19.89 40.162,18.257 40.162,9.168 v1(40.17,9.16)
  Bottom Layer w0.127: v1(40.17,9.16) 40.153,9.143 40.153,6.579 43.25,3.483 J101.126
UART3_TX: J101.124 TP217.1 U201.51 | length 22.4
  Top Layer w0.127: U201.51 38.67,19.39 39.908,18.152 39.908,11.208 39.25,10.55 39.25,8.64 v1(39.29,8.6)
  Bottom Layer w0.127: v1(39.29,8.6) 39.29,6.85 42.65,3.49 J101.124
USB1_DM: J101.83
USB1_DP: J101.85
USB_DM: J101.91 TP220.1 U201.43 | length 25.4
  Top Layer w0.127: U201.43 31.82,17.144 cw(c32.052,17.144) 31.888,17.308 ; 31.888,17.308 ccw(c31.724,17.472) 31.956,17.472 31.956,17.561 cw(c32.403,17.561) 32.087,17.877 ; 32.087,17.877 32.335,18.125 ; 32.336,18.126 cw(c32.936,17.525) 32.936,18.374 33.761,18.374 cw(c33.761,16.382) 35.169,17.791 36.446,16.514 cw(c34.65,14.718) 37.19,14.718 37.19,12.862 cw(c34.65,12.862) 36.446,11.066 34.881,9.501 ; J101.91 32.73,1.545 32.73,2.97 32.571,3.129 32.571,6.139 cw(c35.111,6.139) 33.315,7.935 34.881,9.501 ; TP220.1 34.5,8.582 cw(c35.799,8.582) 34.881,9.501
USB_DP: J101.89 TP222.1 U201.44 | length 24.6
  Top Layer w0.127: J101.89 32.15,2.958 32.317,3.125 32.317,6.244 cw(c34.857,6.244) 33.061,8.04 34.627,9.606 ; U201.44 32.32,17.202 ccw(c32.132,17.202) 32.265,17.335 cw(c32.398,17.468) 32.21,17.468 32.21,17.515 cw(c32.512,17.515) 32.298,17.728 32.494,17.924 cw(c32.967,17.451) 32.967,18.12 33.718,18.12 cw(c33.718,16.306) 35.001,17.589 36.192,16.398 cw(c34.396,14.602) 36.936,14.602 36.936,12.967 cw(c34.396,12.967) 36.192,11.171 34.627,9.606 ; TP222.1 33.821,9.272 ccw(c33.821,10.411) 34.627,9.606
pads on no net: FID1. FID2. FID3. FID4. J101.9 J101.11 J101.13 J101.14 J101.15 J101.16 J101.17 J101.18 J101.19 J101.20 J101.21 J101.22 J101.23 J101.24 J101.25 J101.26 J101.27 J101.28 J101.29 J101.30 J101.31 J101.32 J101.33 J101.34 J101.35 J101.36 J101.37 J101.38 J101.39 J101.40 J101.41 J101.42 J101.43 J101.44 J101.45 J101.46 J101.47 J101.48 J101.53 J101.54 J101.55 J101.56 J101.57 J101.58 J101.59 J101.60 J101.61 J101.62 J101.63 J101.64 J101.70 J101.71 J101.72 J101.74 J101.76 J101.78 J101.79 J101.80 J101.81 J101.82 J101.84 J101.87 J101.90 J101.92 J101.93 J101.94 J101.95 J101.96 J101.97 J101.98 J101.99 J101.100 J101.101 J101.102 J101.103 J101.104 J101.105 J101.106 J101.107 J101.108 J101.109 J101.110 J101.111 J101.112 J101.113 J101.115 J101.121 J101.122 J101.127 J101.128 J101.133 J101.134 J101.136 J101.138 J101.143 J101.144 J101.145 J101.146 J101.147 J101.149 J101.150 J101.151 J101.153 J101.155 J101.156 J101.158 J101.159 J101.160 J101.161 J101.162 J101.166 J101.167 J101.168 J101.169 J101.170 J101.171 J101.172 J101.175 J101.176 J101.185 J101.192 J101.194 J101.195 J101.196 J101.200 U101.3 U201.9 U201.10 U201.11 U201.40 U201.42 U201.54 U201.57 U201.61 U201.62

## Polygon pours and split planes (outlines as drawn)
DGND on Bottom Layer "DGND_L04_P000" (solid, pour order 0): 2.45,1.525 2.45,0 0,0 0,18 ccw(c0,19.99) 1.99,19.99 1.99,20.17 ccw(c0.16,20.17) 0.16,22 -0.01,22 -0.01,45 67.6,45 67.6,22 ccw(c67.6,20.01) 65.61,20.01 65.61,19.99 ccw(c67.6,19.99) 67.6,18 67.6,0 65.45,0 65.45,1.525 16.75,1.525 16.75,3.51 ccw(c16.26,3.51) 16.26,4 16.21,4 ccw(c16.21,3.54) 15.75,3.54 15.75,2.93 13.854,2.93 13.854,1.525
DGND on Top Layer "DGND_L01_P001" (solid, pour order 1): 2.45,1.525 2.45,0 0,0 0,18 ccw(c0,19.99) 1.99,19.99 1.99,20.17 ccw(c0.16,20.17) 0.16,22 -0.01,22 -0.01,45 67.6,45 67.6,22 ccw(c67.6,20.01) 65.61,20.01 65.61,19.99 ccw(c67.6,19.99) 67.6,18 67.6,0 65.45,0 65.45,1.525 16.75,1.525 16.75,3.51 ccw(c16.26,3.51) 16.26,4 16.21,4 ccw(c16.21,3.54) 15.75,3.54 15.75,2.93 13.854,2.93 13.854,1.525
+3.3VD on PWR (split plane): 67.09,22.456 66.95,22.425 66.741,22.359 66.539,22.275 66.345,22.174 66.16,22.056 65.986,21.923 65.825,21.775 65.677,21.614 65.544,21.44 65.426,21.255 65.325,21.061 65.241,20.859 65.175,20.65 65.128,20.436 65.099,20.219 65.09,20 65.099,19.781 65.128,19.564 65.175,19.35 65.241,19.141 65.325,18.939 65.426,18.745 65.544,18.56 65.677,18.386 65.825,18.225 65.986,18.077 66.16,17.944 66.345,17.826 66.539,17.725 66.741,17.641 66.95,17.575 67.09,17.544 67.09,0.51 17.26,0.51 17.26,3.5 17.26,3.509 17.252,3.632 17.226,3.761 17.183,3.887 17.125,4.005 17.051,4.115 16.964,4.214 16.865,4.301 16.755,4.375 16.637,4.433 16.511,4.476 16.382,4.502 16.259,4.51 16.25,4.51 16.241,4.51 16.118,4.502 15.989,4.476 15.863,4.433 15.745,4.375 15.635,4.301 15.536,4.214 15.449,4.115 15.375,4.005 15.317,3.887 15.274,3.761 15.248,3.632 15.24,3.509 15.24,3.5 15.24,0.51 0.51,0.51 0.51,17.544 0.65,17.575 0.859,17.641 1.061,17.725 1.255,17.826 1.44,17.944 1.614,18.077 1.775,18.225 1.923,18.386 2.056,18.56 2.174,18.745 2.275,18.939 2.359,19.141 2.425,19.35 2.472,19.564 2.501,19.781 2.51,20 2.501,20.219 2.472,20.436 2.425,20.65 2.359,20.859 2.275,21.061 2.174,21.255 2.056,21.44 1.923,21.614 1.775,21.775 1.614,21.923 1.44,22.056 1.255,22.174 1.061,22.275 0.859,22.359 0.65,22.425 0.51,22.456 0.51,44.49 67.09,44.49
+1.8VD on PWR (split plane): 24.028,2.438 24.07,2.41 24.12,2.401 51.61,2.401 51.66,2.41 51.702,2.438 53.844,4.581 54.666,4.581 55.031,4.216 55.031,3.154 53.796,1.919 24.004,1.919 20.752,5.172 20.71,5.2 20.66,5.209 9.12,5.209 9.07,5.2 9.028,5.172 7.936,4.079 7.224,4.079 6.949,4.354 6.949,5.006 7.324,5.381 21.086,5.381
DGND on GND (split plane): 67.09,22.456 66.95,22.425 66.741,22.359 66.539,22.275 66.345,22.174 66.16,22.056 65.986,21.923 65.825,21.775 65.677,21.614 65.544,21.44 65.426,21.255 65.325,21.061 65.241,20.859 65.175,20.65 65.128,20.436 65.099,20.219 65.09,20 65.099,19.781 65.128,19.564 65.175,19.35 65.241,19.141 65.325,18.939 65.426,18.745 65.544,18.56 65.677,18.386 65.825,18.225 65.986,18.077 66.16,17.944 66.345,17.826 66.539,17.725 66.741,17.641 66.95,17.575 67.09,17.544 67.09,0.51 17.26,0.51 17.26,3.5 17.26,3.509 17.252,3.632 17.226,3.761 17.183,3.887 17.125,4.005 17.051,4.115 16.964,4.214 16.865,4.301 16.755,4.375 16.637,4.433 16.511,4.476 16.382,4.502 16.259,4.51 16.25,4.51 16.241,4.51 16.118,4.502 15.989,4.476 15.863,4.433 15.745,4.375 15.635,4.301 15.536,4.214 15.449,4.115 15.375,4.005 15.317,3.887 15.274,3.761 15.248,3.632 15.24,3.509 15.24,3.5 15.24,0.51 0.51,0.51 0.51,17.544 0.65,17.575 0.859,17.641 1.061,17.725 1.255,17.826 1.44,17.944 1.614,18.077 1.775,18.225 1.923,18.386 2.056,18.56 2.174,18.745 2.275,18.939 2.359,19.141 2.425,19.35 2.472,19.564 2.501,19.781 2.51,20 2.501,20.219 2.472,20.436 2.425,20.65 2.359,20.859 2.275,21.061 2.174,21.255 2.056,21.44 1.923,21.614 1.775,21.775 1.614,21.923 1.44,22.056 1.255,22.174 1.061,22.275 0.859,22.359 0.65,22.425 0.51,22.456 0.51,44.49 67.09,44.49

## Keep-outs
Keep-Out Layer:
  the board outline again, w0.1

## Other copper
PWR (plane layer: these items are gaps in the copper):
  lines w0.254: 6.82,4.3 6.82,5.06 7.27,5.51 21.14,5.51 24.12,2.53 51.61,2.53 53.79,4.71 54.72,4.71 55.16,4.27 55.16,3.1 53.85,1.79 23.95,1.79 20.66,5.08 9.12,5.08 7.99,3.95 7.17,3.95 6.82,4.3

## Silkscreen, mask and mechanical layers (free items; w line width, h text height)
Top Overlay:
  drawing of 6 lines, arcs and shapes, not listed
  text "Universal Utilities" at 40.945,35.93 h5.56
  text "GROUP" at 47.55,34.022 h3.8
  text "PN :" at 41.028,31.776 h1
  text ".PCB_PN" at 44.808,31.776 h1
  text "RV :" at 41.008,30.026 h1
  text ".PCB_Rev" at 44.808,30.026 h1
  text ".PCB_Name" at 44.834,28.41 h1
  text "MO :" at 41.028,28.366 h1

## Text inside footprints (layer, text, board x,y; h text height)
U201: Top Overlay "*" at 35.894,27.398 h0.79 r270; Mechanical 1 "*" at 35.894,27.398 h0.79 r270